# EAGLE board Stepper Driver jig top (EAGLE 6.6.0)
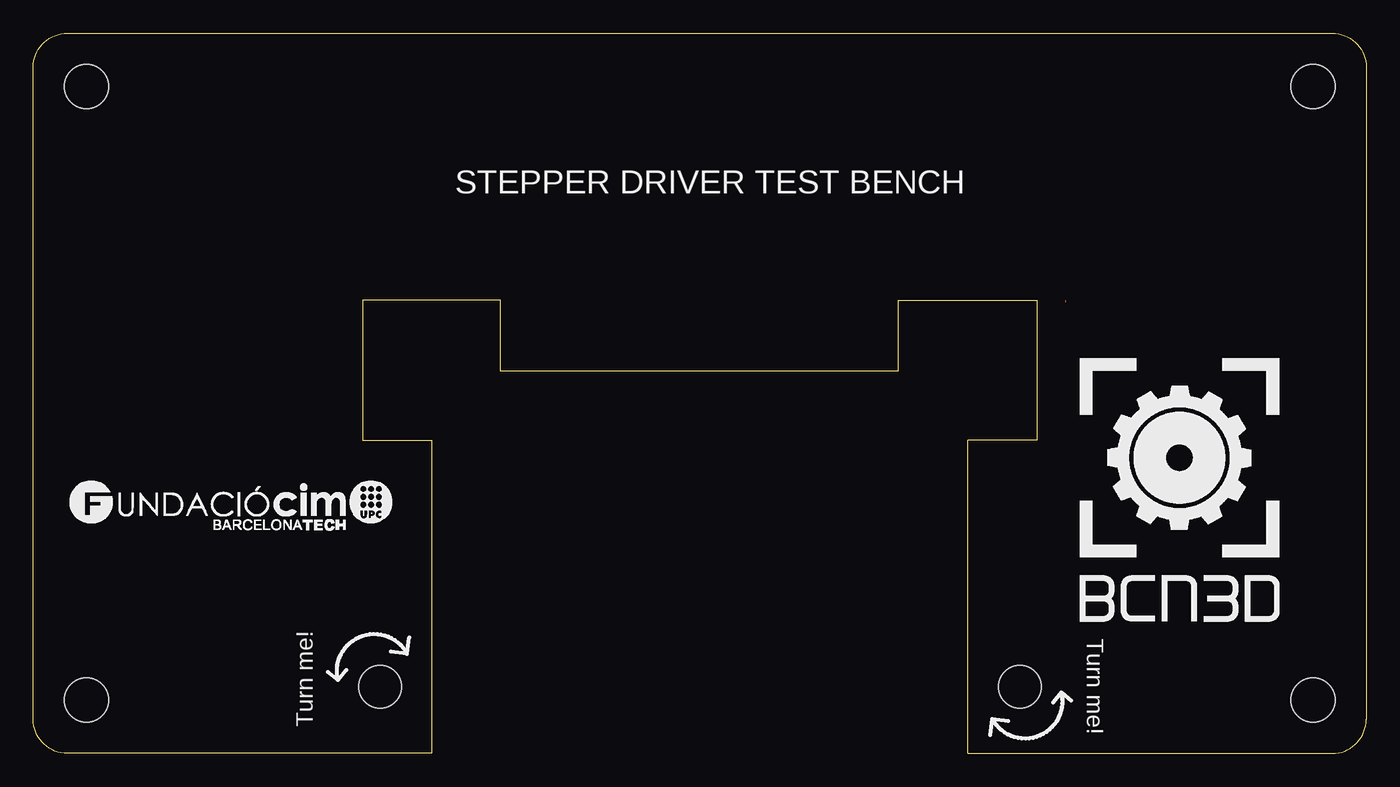
[diagram p0: board, top side]

Size 100 x 54 mm. Coordinates in mm from the lower left corner, seen from the top.
Outline: 2.54,54 97.46,54 arc-90 100,51.46 100,2.54 arc-90 97.46,0 70.1,0 70.1,23.47 75.29,23.47 75.29,33.98 64.92,33.98 64.92,28.65 35.05,28.65 35.05,33.98 24.69,33.98 24.69,23.47 29.87,23.47 29.87,0 2.54,0 arc-90 0,2.54 0,51.46 arc-90 2.54,54
Copper layers (1*16): Top 0.035mm / dielectric 1.5mm / Bottom 0.035mm
Design rules "ITEADstudio_DRC": minimum track width 6mil, minimum drill 12mil, track to track 6mil, track to pad 6mil, pad to pad 6mil, via to via 6mil, smd to smd 0mil, copper to edge 10mil, drill to drill 10mil, minimum pad ring 10mil, minimum via ring 6mil, stop-mask expansion 2mil, vias tented up to drill 100mil, thermal gap 10mil
Holes 3.2 mm at 26,5 74,5

## Footprints (pad centres in the part's own frame; a part is rotated, then mirrored left to right if it is on the bottom)
STAND-OFF = hole 3.302: 0,0

## Placement (x,y rotation side)
E$1  [STAND-OFF]  4,4 0 top
E$2  [STAND-OFF]  4,50 0 top
E$3  [STAND-OFF]  96,50 0 top
E$4  [STAND-OFF]  96,4 0 top
E$5  [BCN3D_LOGO]  78.52,9.9 0 top
E$6  [FCIM_LOGO]  0.91,13.08 0 top

## Library data of the parts
E$1-E$4 = SparkFun-Electromechanical
E$5 E$6 = MarcEagleParts

## Tracks (layer width: path | path; a pad name or v marks a point on that pad's centre or on a via)
S$1
  Top 0: 77.42,33.98 77.42,33.83

## Text on the board
tPlace: STEPPER DRIVER TEST BENCH | Turn me! | Turn me!